# Altium PCB PCB2.PcbDoc (part 1 of 2)
Units mm, origin at the board's own origin, x right, y up, seen from the top; angles counter-clockwise.
Board outline 165.86 x 82.04 mm, 2 copper layers (Top Layer, Bottom Layer); 109 components, 117 nets, 440 pads, 32 vias.
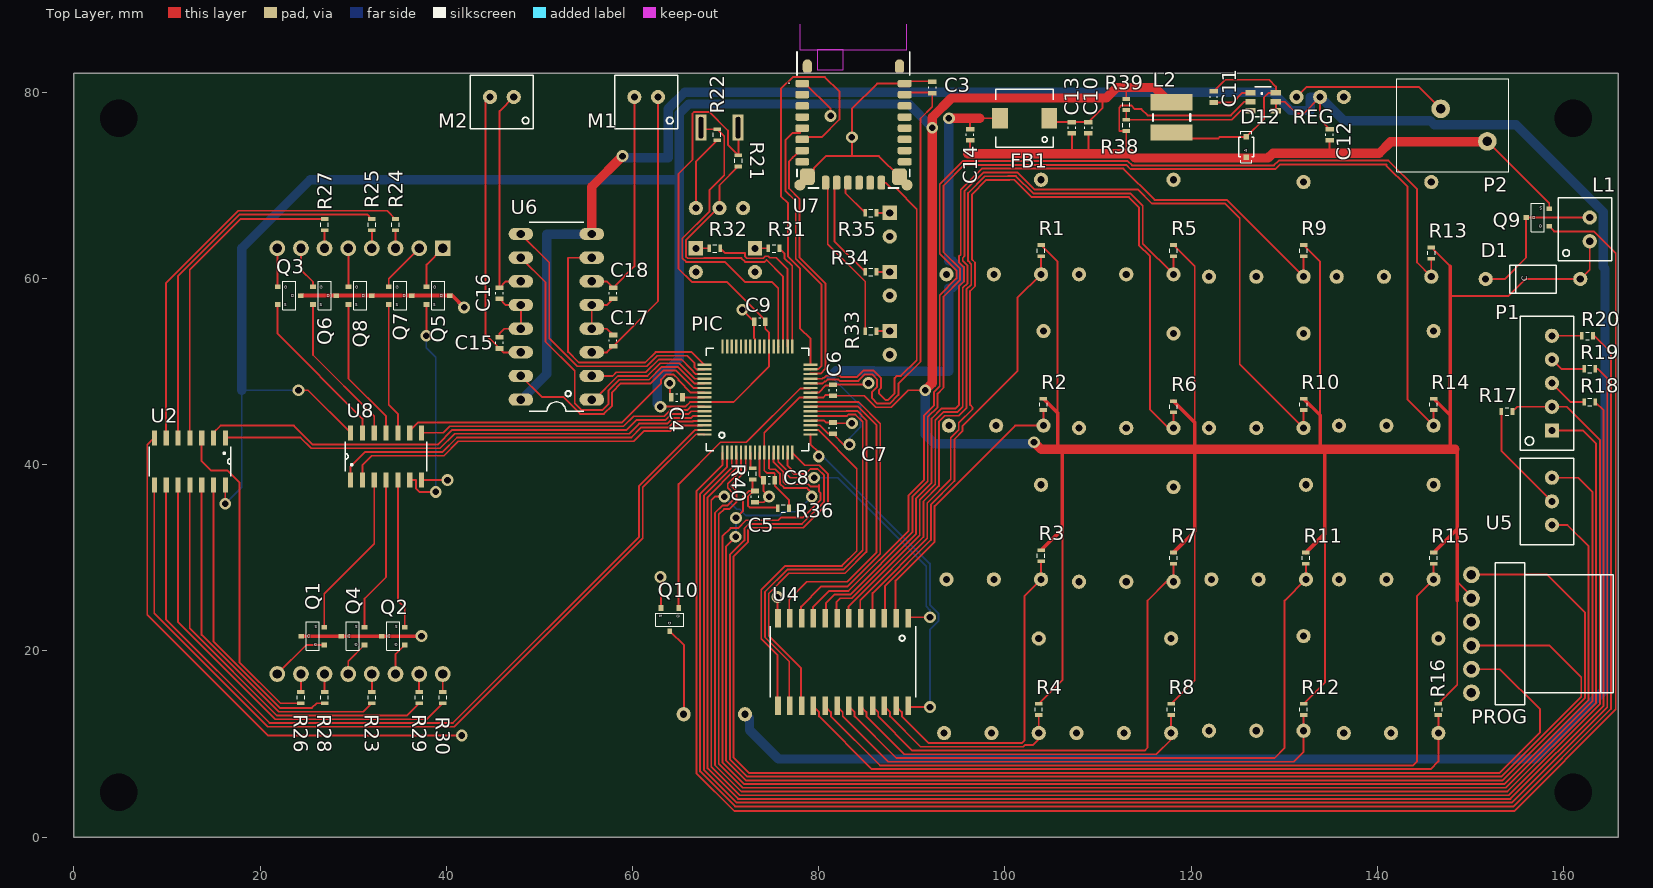
[diagram p0: Top Layer view]
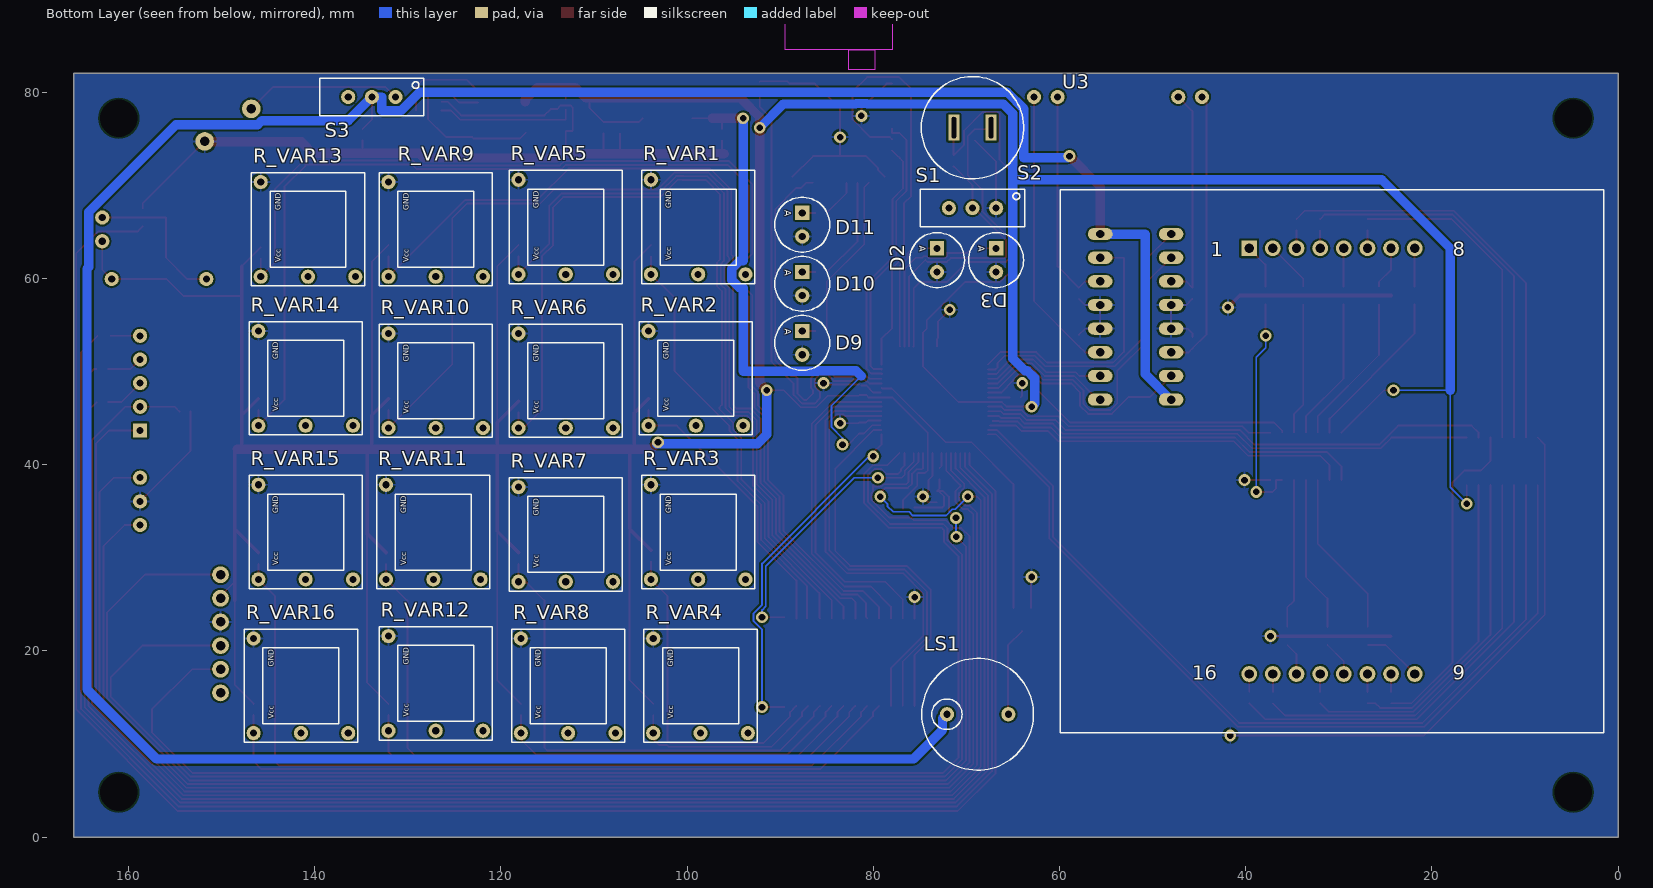
[diagram p1: Bottom Layer view, seen from below]

## Layer stack, top to bottom
Top Solder: solder mask 0.0102, Solder Resist, Dk 3.5
Top Layer: signal copper 0.0356
Dielectric 1: dielectric 0.32, FR-4, Dk 4.8
Bottom Layer: signal copper 0.0356
Bottom Solder: solder mask 0.0102, Solder Resist, Dk 3.5

## Board outline
0,0 165.862,0 165.862,82.042 0,82.042

## Design rules (kind name [scope] priority, off if disabled: settings)
Clearance [All] p1: gap=0.2
HoleSize [All] p1: absolutevalues=TRUE maxlimit=4 minlimit=0.075 maxpercent=80.000 minpercent=20.000
MinimumSolderMaskSliver [All] p1: minsoldermaskwidth=0.15
PolygonConnect [All] p1: connectstyle=Relief reliefconductorwidth=0.254 reliefentries=4 polygonreliefangle="90 Angle" airgapwidth=0.254
RoutingVias [All] p1: holewidth=0.711 width=1.27 viastyle="Through Hole" minholewidth=0.711 minwidth=1.27 maxholewidth=0.711 maxwidth=1.27
SilkToSilkClearance [All] p1: silktosilkclearance=0.1
SilkToSolderMaskClearance [IsPad] p1: minsilkscreentomaskgap=0.15 clearancetoexposedcopper=TRUE
SolderMaskExpansion [All] p1: expansion=0.04
UnpouredPolygon [All] p1: allowunpoured=FALSE
Width [All] p1: maxlimit=1 minlimit=0.2 preferedwidth=0.4
25 further rules are at their usual default settings.

## Classes and differential pairs
component class "START BUTTON": R22 S2
component class "PROXIMITY SENSOR": U5
component class PIC: C4 C5 C6 C7 C8 C9 PIC32Square R36 R40
component class "MUX ORDER GRID": R1 R2 R3 R4 R5 R6 R7 R8 R9 R10 R11 R12 R13 R14 R15 R16 R_VAR1 R_VAR2 R_VAR3 R_VAR4 R_VAR5 R_VAR6 R_VAR7 R_VAR8 R_VAR9 R_VAR10 R_VAR11 R_VAR12 R_VAR13 R_VAR14 R_VAR15 R_VAR16 U4
component class MOTOR: C15 C16 C17 C18 M1 M2 U6
component class "MODE SELECTION": D2 D3 R21 R31 R32 S1
component class "LED MATRIX": Q1 Q2 Q3 Q4 Q5 Q6 Q7 Q8 R23 R24 R25 R26 R27 R28 R29 R30 U2 U3 U8
component class ELECTROMAGNET: D1 L1 Q9
component class "COLOR SENSOR": P1 R17 R18 R19 R20
component class BUZZER: LS1 Q10
component class BLUETOOTH: C3 D9 D10 D11 R33 R34 R35 U7
component class "PIC PROGRAMMER": PROG
component class POWER: C10 C11 C12 C13 C14 D12 FB1 L2 P2 R38 R39 REG S3

## Components (designator, comment, footprint, x,y, rotation, side; value= is the part's Value field where it differs from the comment)
C3 "Cap" Capacitor 92.202,80.518 r270 top
C4 "10μF" Capacitor 64.77,47.244 r180 top
C5 "0.1μF" Capacitor 73.152,36.576 r270 top
C6 "0.1μF" Capacitor 81.534,48.006 r90 top
C7 "0.1μF" Capacitor 81.534,43.942 r90 top
C8 "0.1μF" Capacitor 74.676,38.354 r180 top
C9 "0.1μF" Capacitor 73.66,55.372 r0 top
C10 "47 μF" Capacitor 108.966,76.2 r90 top
C11 "220 nF" Capacitor 122.428,79.502 r270 top
C12 "1 μF" Capacitor 134.874,75.438 r90 top
C13 "1uF" Capacitor 107.188,76.2 r90 top
C14 "100nF" Capacitor 96.266,75.438 r90 top
C15 "0.1μF" capacitor 45.72,53.086 r90 top
C16 "0.1μF" capacitor 45.72,58.42 r90 top
C17 "0.1μF" capacitor 57.912,53.34 r270 top
C18 "0.1μF" capacitor 57.912,58.42 r270 top
D1 "1N4001" Diode 156.72,59.944 r90 top
D2 "MCL053GD" LedGreen 73.152,61.976 r270 bottom
D3 "MCL053MD" LedGreen 66.802,61.976 r270 bottom
D9 "MCL053GD" LedGreen 87.63,53.086 r270 bottom
D10 "MCL053YD" LedGreen 87.63,59.436 r270 bottom
D11 "MCL053GD" LedGreen 87.63,65.786 r270 bottom
D12 "BAS316,115" "Didode (Regulator)" 125.92,74.12 r90 top
FB1 "Comment" Inductor 102.108,77.216 r180 top
L1 "G5RL-U/-K" Electromagnet 162.814,65.278 r90 top
L2 "39uH" "Inductor (regulator)" 117.91,77.305 r180 top
LS1 "ABT-414-RC" Buzzer 68.79,13.2 r90 bottom
M1 "MG-6-120" Motor2 61.468,79.502 r180 top
M2 "MG-6-120" Motor2 45.974,79.502 r180 top
P1 "JST5" LDR_RGB 158.75,48.768 r90 top
P2 "TerminalConnector" TerminalConector 146.812,78.232 r270 top
PIC "PIC32MX340F256H" PIC32 73.41,46.99 r90 top (schematic designator PIC32Square)
PROG "22-29-2061" HEADER-6-PIN 150.114,21.844 r270 top
Q1 "2N7002" Mosfet 25.654,21.59 r180 top
Q2 "2N7002" Mosfet 34.29,21.59 r180 top
Q3 "2N7002" Mosfet 23.114,58.166 r0 top
Q4 "2N7002" Mosfet 29.972,21.59 r180 top
Q5 "2N7002" Mosfet 39.116,58.166 r0 top
Q6 "2N7002" Mosfet 26.924,58.166 r0 top
Q7 "2N7002" Mosfet 35.052,58.166 r0 top
Q8 "2N7002" Mosfet 30.734,58.166 r0 top
Q9 "2N7002-G" Mosfet 157.226,66.548 r180 top
Q10 "2N7002-G" Mosfet 64.008,23.368 r270 top
R1 "10 K" Resistor0603 103.886,62.992 r270 top
R2 "10 K" Resistor0603 104.14,46.482 r270 top
R3 "10 K" Resistor0603 103.886,30.226 r270 top
R4 "10 K" Resistor0603 103.632,13.716 r270 top
R5 "10 K" Resistor0603 118.11,62.992 r270 top
R6 "10 K" Resistor0603 118.11,46.228 r270 top
R7 "10 K" Resistor0603 118.11,29.972 r270 top
R8 "10 K" Resistor0603 117.856,13.716 r270 top
R9 "10 K" Resistor0603 132.08,62.992 r270 top
R10 "10 K" Resistor0603 132.08,46.482 r270 top
R11 "10 K" Resistor0603 132.334,29.972 r270 top
R12 "10 K" Resistor0603 132.08,13.716 r270 top
R13 "10 K" Resistor0603 145.796,62.738 r270 top
R14 "10 K" Resistor0603 146.05,46.482 r270 top
R15 "10 K" Resistor0603 146.05,29.972 r270 top
R16 "10 K" Resistor0603 146.558,13.716 r270 top
R17 "1K" Resistor0603 153.924,45.72 r180 top
R18 "87 Ohm" Resistor0603 162.814,46.736 r180 top
R19 "20 Ohm" Resistor0603 162.814,50.292 r180 top
R20 "20 Ohm" Resistor0603 162.56,53.848 r180 top
R21 "5 KOhm" Resistor0603 71.374,72.644 r90 top
R22 "5 KOhm" Resistor0603 69.088,75.438 r90 top
R23 "80 Ohm" Resistor0603 32.004,14.986 r270 top
R24 "80 Ohm" Resistor0603 34.544,65.786 r90 top
R25 "80 Ohm" Resistor0603 32.004,65.786 r90 top
R26 "80 Ohm" Resistor0603 24.384,14.986 r270 top
R27 "80 Ohm" Resistor0603 26.924,65.786 r90 top
R28 "80 Ohm" Resistor0603 26.924,14.986 r270 top
R29 "80 Ohm" Resistor0603 37.084,14.986 r270 top
R30 "80 Ohm" Resistor0603 39.624,14.986 r270 top
R31 "80 Ohm" Resistor0603 75.184,63.246 r180 top
R32 "93 Ohm" Resistor0603 68.834,63.246 r180 top
R33 "80 Ohm" Resistor0603 85.598,54.356 r180 top
R34 "80 Ohm" Resistor0603 85.598,60.706 r180 top
R35 "80 Ohm" Resistor0603 85.598,67.056 r180 top
R36 "10K" Resistor0603 76.2,35.306 r0 top
R38 "1 KOhm" Resistor0603 113.03,76.454 r90 top
R39 "3.32 KOhm" Resistor0603 113.03,78.694 r90 top
R40 "470 Ohm" Resistor0603 72.898,39.024 r270 top
R_VAR1 "1.5K ~ 100K" OrderPiece 98.806,65.532 r90 bottom
R_VAR2 "1.5K ~ 100K" OrderPiece 99.06,49.276 r90 bottom
R_VAR3 "1.5K ~ 100K" OrderPiece 98.806,32.766 r90 bottom
R_VAR4 "1.5K ~ 100K" OrderPiece 98.552,16.256 r90 bottom
R_VAR5 "1.5K ~ 100K" OrderPiece 113.03,65.532 r90 bottom
R_VAR6 "1.5K ~ 100K" OrderPiece 113.03,49.022 r90 bottom
R_VAR7 "1.5K ~ 100K" OrderPiece 113.03,32.512 r90 bottom
R_VAR8 "1.5K ~ 100K" OrderPiece 112.776,16.256 r90 bottom
R_VAR9 "1.5K ~ 100K" OrderPiece 127,65.278 r90 bottom
R_VAR10 "1.5K ~ 100K" OrderPiece 127,49.022 r90 bottom
R_VAR11 "1.5K ~ 100K" OrderPiece 127.254,32.766 r90 bottom
R_VAR12 "1.5K ~ 100K" OrderPiece 127,16.51 r90 bottom
R_VAR13 "1.5K ~ 100K" OrderPiece 140.716,65.278 r90 bottom
R_VAR14 "1.5K ~ 100K" OrderPiece 140.97,49.276 r90 bottom
R_VAR15 "1.5K ~ 100K" OrderPiece 140.97,32.766 r90 bottom
R_VAR16 "1.5K ~ 100K" OrderPiece 141.478,16.256 r90 bottom
REG "LMR14203X" REGULATOR 127.73,78.99 r270 top (schematic designator REGULATOR)
S1 "SS12SDP2" Switch 69.342,67.564 r270 bottom
S2 "R13-509A-05-BB" StartButton 69.342,76.2 r180 bottom
S3 "SS12SDP2" Switch 133.858,79.502 r270 bottom
U2 "74HC164" "SHIFT REGISTER" 12.46,40.35 r270 top
U3 "TC23-11GWA" LEDPANEL 30.734,40.386 r180 bottom
U4 "CD74HC4067SM96" MUX 82.61,18.83 r270 top
U5 "GP2Y0A41SK0F" Proximity2 158.75,36.068 r90 top
U6 "L293DNE" MotorDriver 51.82,55.89 r180 top
U7 "RN4020" bluetooth 78.232,77.216 r0 top
U8 "74HC164" "SHIFT REGISTER" 33.53,40.89 r90 top

## Footprints (in the part's own frame and the unit in brackets; to place one, negate y for a bottom-side part, rotate by r counter-clockwise, add the part's x,y. Pads: shape width x height; smd on the part's side, far side on the other; paste and mask are expansions set on the pad)
bluetooth [mm] "RN4020"
  rrect50% 1.5x0.8 smd: 1(0,3.727) 2(0,2.527) 3(0,1.327) 4(0,0.127) 5(0,-1.073) 6(0,-2.273) 7(0,-3.473) 8(0,-4.673) 17(11,-4.673) 18(11,-3.473) 19(11,-2.273) 20(11,-1.073) 21(11,0.127) 22(11,1.327) 23(11,2.527) 24(11,3.727)
  oval 1x1.6 smd: 1A(0.55,5.527) 24A(10.45,5.527)
  round 1.2 smd: 9(-0.25,-7.173) 16(11.25,-7.173)
  rrect50% 1.6x1.8 smd: 9(0.55,-6.273) 16(10.45,-6.273)
  rrect50% 0.8x1.5 smd: 10(2.5,-6.923) 11(3.7,-6.923) 12(4.9,-6.923) 13(6.1,-6.923) 14(7.3,-6.923) 15(8.5,-6.923)
  Keep-Out Layer region: -0.25,7.377 11.25,7.377 11.25,12.327 -0.25,12.327
  Keep-Out Layer region: 1.6,5.227 4.4,5.227 4.4,7.377 1.6,7.377
  silkscreen extent -0.55,-7.47 11.55,7.13
Buzzer [mil] "ABT-414-RC"
  round 60 hole 30: 1(0,129.92) 2(0,-129.92)
  silkscreen extent -236,-236 236,236
Capacitor [mm] "0603"
  rect 0.5x0.9 smd: 1(-0.6,0) 2(0.6,0)
  silkscreen extent -0.1,-0.4 0.1,0.4
capacitor [mm] "0603"
  rect 0.5x0.9 smd: 1(-0.6,0) 2(0.6,0)
  silkscreen extent -0.1,-0.4 0.1,0.4
"Didode (Regulator)" [mm] "BAS316,115"
  rect 0.6x0.6 smd: 1(-1.1,0) 2(1.1,0)
  silkscreen extent -1.7,-0.82 1.7,0.82
Diode [mil] "1N4001"
  round 60 hole 30: 1(0,200) 2(0,-200)
  silkscreen extent -59,-98 59,98
Electromagnet [mil]
  round 60 hole 30: 1(-50,0) 2(50,0)
  silkscreen extent -133,-93 133,134
HEADER-6-PIN [mm] "22-29-2061"
  round 1.8 hole 1.02: 1(-6.35,0) 2(-3.81,0) 3(-1.27,0) 4(1.27,0) 5(3.81,0) 6(6.35,0)
  silkscreen extent -7.62,2.55 7.62,15.21
Inductor [mm]
  rect 1.7x2.2 smd: 1(-2.65,0) 2(2.65,0)
  silkscreen extent -3.1,-3.1 3.1,3.1
"Inductor (regulator)" [mm] "744773139"
  rect 4.5x1.75 smd: 1(0,1.625) 2(0,-1.625)
  silkscreen extent -2,-0.35 2,0.35
LDR_RGB [mil]
  rect 60x60 hole 30: 1(-200,0)
  round 60 hole 30: 2(-100,0) 3(0,0) 4(100,0) 5(200,0)
  silkscreen extent -283,-93 283,134
LedGreen [mil] "MCL053GD"
  rect 60x60 hole 30: 1(-50,0)
  round 60 hole 30: 2(50,0)
  silkscreen extent -116,-116 116,116
LEDPANEL [mm] "TC23-11GWA"
  rect 1.7x1.7 hole 1: 1(-8.89,22.86)
  round 1.7 hole 1: 2(-6.35,22.86) 3(-3.81,22.86) 4(-1.27,22.86) 5(1.27,22.86) 6(3.81,22.86) 7(6.35,22.86) 8(8.89,22.86) 9(8.89,-22.86) 10(6.35,-22.86) 11(3.81,-22.86) 12(1.27,-22.86) 13(-1.27,-22.86) 14(-3.81,-22.86) 15(-6.35,-22.86) 16(-8.89,-22.86)
  silkscreen extent -29.17,-29.17 29.17,29.17
Mosfet [mm] "2N7002_G"
  rect 0.6x0.5 smd: 1(-1.24,0.95) 2(-1.24,-0.95) 3(1.24,0)
  silkscreen extent -0.7,-1.52 0.7,1.52
Motor2 [mil]
  round 60 hole 30: 1(-50,0) 2(50,0)
  silkscreen extent -133,-93 133,134
MotorDriver [mil] "L293DNE"
  oval 104x52 hole 35.43: 1(-150,350) 2(-150,250) 3(-150,150) 4(-150,50) 5(-150,-50) 6(-150,-150) 7(-150,-250) 8(-150,-350) 9(150,-350) 10(150,-250) 11(150,-150) 12(150,-50) 13(150,50) 14(150,150) 15(150,250) 16(150,350)
  silkscreen extent -115,-400 115,400
MUX [mm] "CD74HC4067"
  rect 2x0.6 smd: 1(-4.7,6.985) 2(-4.7,5.715) 3(-4.7,4.445) 4(-4.7,3.175) 5(-4.7,1.905) 6(-4.7,0.635) 7(-4.7,-0.635) 8(-4.7,-1.905) 9(-4.7,-3.175) 10(-4.7,-4.445) 11(-4.7,-5.715) 12(-4.7,-6.985) 13(4.7,-6.985) 14(4.7,-5.715) 15(4.7,-4.445) 16(4.7,-3.175) 17(4.7,-1.905) 18(4.7,-0.635) 19(4.7,0.635) 20(4.7,1.905) 21(4.7,3.175) 22(4.7,4.445) 23(4.7,5.715) 24(4.7,6.985)
  silkscreen extent -3.8,-7.8 3.8,7.8
OrderPiece [mil]
  round 60 hole 30: 1(-200,200) 2(200,200) 3(-200,0) 4(-200,-200)
  silkscreen extent -239,-239 239,239
PIC32 [mm] "PIC32MX270F256D"
  rect 1.5x0.25 smd: 1(-5.7,3.75) 2(-5.7,3.25) 3(-5.7,2.75) 4(-5.7,2.25) 5(-5.7,1.75) 6(-5.7,1.25) 7(-5.7,0.75) 8(-5.7,0.25) 9(-5.7,-0.25) 10(-5.7,-0.75) 11(-5.7,-1.25) 12(-5.7,-1.75) 13(-5.7,-2.25) 14(-5.7,-2.75) 15(-5.7,-3.25) 16(-5.7,-3.75) 33(5.7,-3.75) 34(5.7,-3.25) 35(5.7,-2.75) 36(5.7,-2.25) 37(5.7,-1.75) 38(5.7,-1.25) 39(5.7,-0.75) 40(5.7,-0.25) 41(5.7,0.25) 42(5.7,0.75) 43(5.7,1.25) 44(5.7,1.75) 45(5.7,2.25) 46(5.7,2.75) 47(5.7,3.25) 48(5.7,3.75)
  rect 0.25x1.5 smd: 17(-3.75,-5.7) 18(-3.25,-5.7) 19(-2.75,-5.7) 20(-2.25,-5.7) 21(-1.75,-5.7) 22(-1.25,-5.7) 23(-0.75,-5.7) 24(-0.25,-5.7) 25(0.25,-5.7) 26(0.75,-5.7) 27(1.25,-5.7) 28(1.75,-5.7) 29(2.25,-5.7) 30(2.75,-5.7) 31(3.25,-5.7) 32(3.75,-5.7) 49(3.75,5.7) 50(3.25,5.7) 51(2.75,5.7) 52(2.25,5.7) 53(1.75,5.7) 54(1.25,5.7) 55(0.75,5.7) 56(0.25,5.7) 57(-0.25,5.7) 58(-0.75,5.7) 59(-1.25,5.7) 60(-1.75,5.7) 61(-2.25,5.7) 62(-2.75,5.7) 63(-3.25,5.7) 64(-3.75,5.7)
  silkscreen extent -5.5,-5.5 5.5,5.5
Proximity2 [mil]
  round 60 hole 30: 1(-100,0) 2(0,0) 3(100,0)
  silkscreen extent -183,-93 183,134
REGULATOR [mm]
  rect 0.6x1.1 smd: 1(-0.95,-1.35) 2(0,-1.35) 3(0.95,-1.35) 4(0.95,1.35) 5(0,1.35) 6(-0.95,1.35)
  silkscreen extent -1.6,-0.87 1.6,0.87
Resistor0603 [mm]
  rect 0.4x0.8 smd: 1(-0.6,0) 2(0.6,0)
  silkscreen extent -0.2,-0.4 0.2,0.4
"SHIFT REGISTER" [mil] "74HC164"
  rect 63x22 smd: 1(-100,150) 2(-100,100) 3(-100,50) 4(-100,0) 5(-100,-50) 6(-100,-100) 7(-100,-150) 8(100,-150) 9(100,-100) 10(100,-50) 11(100,0) 12(100,50) 13(100,100) 14(100,150)
  silkscreen extent -62,-172 62,172
StartButton [mm] "R13-509A-05-BB"
  rect 1.2x2.8 hole 0.5 slot 2.3 at 90 deg: 1(-2,0) 2(2,0)
  silkscreen extent -5.5,-5.5 5.5,5.5
Switch [mil] "SS12SDP2"
  round 60 hole 30: 1(0,100) 2(0,0) 3(0,-100)
  silkscreen extent -79,-220 79,220
TerminalConector [mm]
  round 2 hole 1: 1(0,0) 2(3.5,5)
  silkscreen extent -3.25,-4.7 6.75,7.3

## Part data
C3: "Capacitor"
C4 C5 C6 C7 C8 C9 C10 C11 C12 C13 C14 C15 C16 C17 C18: library part Cap, "Capacitor"
D1 D12: library part Diode, "Default Diode"
D2 D3 D9 D10 D11: library part LED0, "Typical INFRARED GaAs LED"
FB1 L2: library part Inductor, "Inductor"
L1: library part "Inductor Iron", "Magnetic-Core Inductor"
LS1: library part "Header 2", "Header, 2-Pin"
M1 M2: library part Motor, "Motor, General Kind"
P1: library part MHDR1X5, "Header, 5-Pin"
P2: library part "Header 2H", "Header, 2-Pin, Right Angle"
PIC: library part PIC32square
PROG: library part HEADER-6-PIN
Q1 Q2 Q3 Q4 Q5 Q6 Q7 Q8 Q9 Q10: library part MOSFET-N, "N-Channel MOSFET"
R1 R2 R3 R4 R5 R6 R7 R8 R9 R10 R11 R12 R13 R14 R15 R16 R17 R18 R19 R20 R21 R22 R23 R24 R25 R26 R27 R28 R29 R30 R31 R32 R33 R34 R35 R36 R38 R39 R40 R_VAR1 R_VAR2 R_VAR3 R_VAR4 R_VAR5 R_VAR6 R_VAR7 R_VAR8 R_VAR9 R_VAR10 R_VAR11 R_VAR12 R_VAR13 R_VAR14 R_VAR15 R_VAR16: library part Res1, "Resistor"
REG: library part Regulator
S1 S3: library part SW-SPST, "Single-Pole, Single-Throw Switch"
S2: library part SW-PB, "Switch"
U2 U8: library part "Shift Register"
U3: library part "LED Dot Matrix"
U4: library part "Analog Multiplexor"
U5: library part "Proximity sensor"
U6: library part "Motor Driver"
U7: library part Blueetooth

## Free pads (board coordinates)
  round 2.4 hole 4 unplated: 2(4.826,4.826) 2(4.826,77.216) 2(161.036,4.826) 2(161.036,77.216)

## Via types
v1: diameter 1.27, hole 0.711, Top Layer to Bottom Layer, 32 vias

## Nets (pads, with @x,y where several pads share a name; then routed paths per layer and width w, separated by ;. In a path a pad name is that pad's centre, name@x,y a point inside that pad or via, vN(x,y) a via of type N, cw(c..) or ccw(c..) an arc to the next point about the centre after c; other vN are vias at no path point)
3.3V: C6.1 C8.1 C9.2 C10.2 C13.2 D1.2 FB1.1 L1.1 L2.2 PIC.10 PIC.25 PIC.38 PIC.57 PROG.2 R1.1 R2.1 R3.1 R4.1 R5.1 R6.1 R7.1 R8.1 R9.1 R10.1 R11.1 R12.1 R13.1 R14.1 R15.1 R16.1 R21.2 R36.2 R39.2 S2.1 U2.14 U8.14 | length 621.2
  Top Layer w0.2: v1(16.256,35.814) U2.14@16.256,37.846 ; v1(24.13,48.006) 25.146,48.006 U8.14@29.718,43.434 ; v1(62.992,46.228) 63.03,46.266 65.709,46.266 66.183,46.74 PIC.57@67.71,46.74 70.87,46.74 74.656,50.526 74.656,54.214 74.26,54.61 C9.2@74.26,55.372 74.26,55.494 70.11,59.644 66.362,59.644 64.94,61.066 64.94,71.256 66.442,72.758 66.442,77.724 66.618,77.9 68.25,77.9 70.25,75.9 70.25,74.368 R21.2@71.374,73.244 71.374,76.168 S2.1@71.342,76.2 ; R36.2@76.8,35.306 76.8,36.23 75.276,37.754 C8.1@75.276,38.354 75.276,39.024 75.184,39.116 74.422,39.116 74.156,39.382 74.156,43.454 77.942,47.24 PIC.25@79.11,47.24 80.514,47.24 80.772,47.498 81.442,47.498 C6.1@81.534,47.406 84.894,47.406 86.129,46.171 87.785,46.171 89.62,48.006 v1(91.44,48.006) ; R4.1@103.632,14.316 106.172,16.856 106.172,33.112 ; R1.1@103.886,63.592 105.664,61.814 105.664,45.558 ; FB1.1@104.758,77.216 105.174,76.8 C13.2@107.188,76.8 C10.2@108.966,76.8 110.49,78.324 110.49,79.394 ; R39.2@113.03,79.294 113.03,80.518 ; R8.1@117.856,14.316 120.396,16.856 120.396,32.858 ; R5.1@118.11,63.592 120.396,61.306 120.396,44.542 ; R12.1@132.08,14.316 134.366,16.602 134.366,32.604 ; R9.1@132.08,63.592 133.858,61.814 133.858,45.304 ; R13.1@145.796,63.338 147.828,61.306 ; R16.1@146.558,14.316 148.59,16.348 148.59,25.4 ; 147.828,58.12 154.066,58.12 155.89,59.944 161.798,59.944 162.814,60.96 L1.1@162.814,64.008 ; 148.336,41.656 148.59,41.402 ; 148.59,27.432 PROG.2@150.368,25.654
  Top Layer w0.4: R3.1@103.886,30.826 106.172,33.112 106.172,41.656 ; R2.1@104.14,47.082 105.664,45.558 105.664,41.656 ; R7.1@118.11,30.572 120.396,32.858 120.396,41.656 120.396,44.542 R6.1@118.11,46.828 ; R10.1@132.08,47.082 133.858,45.304 133.858,41.656 ; R11.1@132.334,30.572 134.366,32.604 134.366,41.656 ; R15.1@146.05,30.572 148.59,33.112 ; R14.1@146.05,47.082 147.828,45.304 ; 147.828,41.656 147.828,45.304 ; 147.828,61.306 147.828,58.12 147.828,45.304 ; 148.59,25.4 148.59,27.432 148.59,33.112 ; 148.59,41.402 148.59,33.112
  Top Layer w1: v1(91.44,48.006) 92.202,48.768 v1(92.202,76.2) 92.202,77.326 94.27,79.394 110.49,79.394 110.89,79.394 112.014,80.518 113.03,80.518 116.082,80.518 117.371,79.229 L2.2@117.371,78.971 ; v1(103.124,42.418) 103.886,41.656 105.664,41.656 106.172,41.656 120.396,41.656 133.858,41.656 134.366,41.656 147.828,41.656 148.336,41.656
  Bottom Layer w0.2: v1(16.256,35.814) 18.034,37.592 18.034,48.006 v1(24.13,48.006)
  Bottom Layer w1: 18.034,48.006 18.034,63.246 25.4,70.612 65.024,70.612 ; v1(62.992,46.228) 62.673,46.547 62.673,49.321 63.455,50.103 63.709,50.103 65.024,51.418 65.024,70.612 ; v1(91.44,48.006) 91.44,43.25 92.439,42.251 103.291,42.251 v1(103.124,42.418) ; v1(92.202,76.2) 89.662,78.74 81.898,78.74 81.833,78.805 80.727,78.805 80.662,78.74 66.04,78.74 65.024,77.724 65.024,70.612
3.3VA: C7.1 C14.2 FB1.2 PIC.19 | length 62.1
  Top Layer w0.2: PIC.19@79.198,44.24 80.112,44.24 81.01,43.342 C7.1@81.534,43.342 82.712,42.164 v1@83.566,42.164 ; C14.2@96.266,76.038 96.266,76.708 ; 97.282,77.216 FB1.2@99.458,77.216
  Top Layer w1: v1(93.98,77.216) 97.282,77.216
  Bottom Layer w0.2: 81.28,49.53 84.501,46.309 84.501,44.063 83.312,42.874 v1(83.312,42.164)
  Bottom Layer w1: 81.28,49.53 81.853,50.103 85.897,50.103 85.962,50.038 93.98,50.038 93.98,58.99 94.332,58.99 95.188,59.846 95.188,61.058 94.332,61.914 93.98,61.914 v1(93.98,77.216)
6V: C12.2 LS1.1 REG.4 REG.5 S3.2 U6.8 U6.16 | length 312.7
  Top Layer w0.2: REG.4@129.112,78.044 129.112,78.994 130.048,78.994 131.318,77.724 132.08,77.724 S3.2@133.858,79.502 133.858,77.054 C12.2@134.874,76.038
  Top Layer w1: U6.8@55.626,64.77 55.626,69.85 v1(58.928,73.152)
  Bottom Layer w1: U6.16@48.006,46.99 48.05,46.99 50.8,49.74 50.8,64.77 U6.8@55.626,64.77 ; v1(58.928,73.152) 59.112,72.968 63.824,72.968 63.824,78.221 65.608,80.005 128.747,80.005 130.712,78.04 132.78,78.04 132.78,79.502 S3.2@133.858,79.502 136.398,76.962 145.678,76.962 146.108,76.532 154.898,76.532 164.276,67.154 164.276,61.231 164.46,61.047 164.46,15.87 156.978,8.388 75.686,8.388 72.561,11.513 72.561,12.781 LS1.1@72.134,13.208
"COL 1": R23.2 U2.12 | length 38.2
  Top Layer w0.2: U2.12@13.716,37.846 13.716,24.269 13.716,21.729 21.983,13.462 31.08,13.462 R23.2@32.004,14.386
"COL 2": R24.2 U2.6 | length 44.8
  Top Layer w0.2: U2.6@9.906,42.926 9.906,59.551 17.641,67.286 33.644,67.286 R24.2@34.544,66.386
"COL 3": R25.2 U2.5 | length 41.1
  Top Layer w0.2: U2.5@11.176,42.926 11.176,60.256 17.806,66.886 31.504,66.886 R25.2@32.004,66.386
"COL 4": R26.2 U2.3 | length 35.3
  Top Layer w0.2: U2.3@13.716,42.926 13.716,40.386 14.732,39.37 16.51,39.37 17.78,38.1 17.78,18.796 22.19,14.386 R26.2@24.384,14.386
"COL 5": R27.2 U2.4 | length 34.8
  Top Layer w0.2: U2.4@12.446,42.926 12.446,60.96 17.872,66.386 R27.2@26.924,66.386
"COL 6": R28.2 U2.13 | length 31.9
  Top Layer w0.2: U2.13@14.986,37.846 14.986,23.564 14.986,21.024 22.124,13.886 25.57,13.886 26.07,14.386 R28.2@26.924,14.386
"COL 7": R29.2 U2.11 | length 44.5
  Top Layer w0.2: U2.11@12.446,37.846 12.446,24.973 12.446,22.433 21.817,13.062 35.76,13.062 R29.2@37.084,14.386
"COL 8": R30.2 U2.10 | length 48.2
  Top Layer w0.2: U2.10@11.176,37.846 11.176,25.654 11.176,23.114 21.628,12.662 37.9,12.662 R30.2@39.624,14.386
GND: C3.1 C4.2 C5.2 C6.2 C7.2 C8.2 C9.1 C10.1 C12.1 C13.1 C14.1 C15.2 C16.1 C17.1 C18.2 D2.2 D3.2 D9.2 D10.2 D11.2 D12.1 P2.2 PIC.9 PIC.20 PIC.26 PIC.41 PROG.3 Q1.3 Q2.3 Q3.3 Q4.3 Q5.3 Q6.3 Q7.3 Q8.3 Q9.2 Q10.2 R17.2 R22.1 R38.1 R_VAR1.2 R_VAR2.2 R_VAR3.2 R_VAR4.2 R_VAR5.2 R_VAR6.2 R_VAR7.2 R_VAR8.2 R_VAR9.2 R_VAR10.2 R_VAR11.2 R_VAR12.2 R_VAR13.2 R_VAR14.2 R_VAR15.2 R_VAR16.2 REG.2 S1.1 U2.7 U4.12 U5.2 U6.4 U6.5 U6.12 U6.13 U7.1 U7.9 U7.16 U7.24 U8.7 | length 286.2
  Top Layer w0.2: U2.7@8.636,42.926 7.874,42.164 7.874,23.876 20.828,10.922 v1(41.656,10.922) ; U8.7@37.338,38.354 v1(40.132,38.354) ; C15.2@45.72,53.686 45.72,54.102 46.228,54.61 48.006,54.61 48.006,57.15 46.39,57.15 C16.1@45.72,57.82 ; C17.1@57.912,53.94 57.242,54.61 55.626,54.61 55.626,57.15 57.242,57.15 C18.2@57.912,57.82 ; v1(62.992,27.94) 63.058,27.874 Q10.2@63.058,24.608 ; v1(64.008,48.768) 64.008,47.406 C4.2@64.17,47.244 ; D3.2@66.802,60.706 D3.2@66.802,61.384 ; S1.1@66.802,67.056 S1.1@66.802,67.564 66.802,72.552 R22.1@69.088,74.838 ; v1(71.79,56.642) C9.1@73.06,55.372 73.06,53.61 73.156,53.514 PIC.41@73.156,52.69 ; C5.2@73.152,35.976 74.076,35.976 v1(74.676,36.576) 74.076,37.176 C8.2@74.076,38.354 73.656,38.774 PIC.9@73.656,41.29 ; U4.12@75.565,23.496 v1(75.565,25.781) ; U7.1@77.978,80.943 U7.1@78.232,80.943 78.569,80.943 81.28,78.232 v1(81.28,77.47) ; U7.9@78.782,70.943 79.502,71.663 79.502,71.882 80.772,73.152 83.566,73.152 ; PIC.20@79.198,44.74 80.574,44.74 80.772,44.542 C7.2@81.534,44.542 81.626,44.45 v1(83.566,44.45) ; PIC.26@79.198,47.74 79.998,47.74 80.772,48.514 C6.2@81.28,48.514 ; C6.2@81.534,48.606 84.674,48.606 84.836,48.768 v1(85.344,48.768) ; U7.16@88.682,70.943 86.473,73.152 83.566,73.152 ; C3.1@92.202,81.118 92.123,81.197 89.232,81.197 88.978,80.943 86.277,80.943 83.566,78.232 v1(83.566,75.184) 83.566,73.152 ; 96.012,73.406 96.266,73.66 C14.1@96.266,74.838 ; 107.188,73.406 C13.1@107.188,75.6 ; 108.712,73.406 108.966,73.66 C10.1@108.966,75.6 ; 113.03,73.406 R38.1@113.03,75.854 112.289,75.854 112.276,75.867 112.276,78.364 112.506,78.594 113.554,78.594 113.954,78.194 114.668,78.194 115.332,77.53 124.266,77.53 125.73,78.994 REG.2@126.412,78.994 ; 134.874,73.466 C12.1@134.874,74.838 ; P2.2@151.582,74.676 151.638,74.732 P2.2@151.812,74.732 158.466,68.078 Q9.2@158.466,67.498 ; R17.2@153.324,45.72 153.324,41.494 U5.2@158.75,36.068
  Top Layer w0.4: Q3.3@24.354,58.166 Q6.3@28.164,58.166 Q8.3@31.974,58.166 Q7.3@36.292,58.166 Q5.3@40.356,58.166 40.64,58.166 v1(41.91,56.896) ; Q1.3@24.414,21.59 Q4.3@28.732,21.59 Q2.3@33.05,21.59 v1(37.338,21.59)
  Top Layer w1: 96.012,73.406 107.188,73.406 108.712,73.406 113.03,73.406 113.527,73.406 113.986,72.947 128.265,72.947 128.784,73.466 134.874,73.466 140.212,73.466 141.422,74.676 P2.2@151.582,74.676 ; P2.2@151.638,74.732 P2.2@151.892,74.986
"INPUT 1": R1.2 R_VAR1.1 U4.3 | length 45.8
  Top Layer w0.2: U4.3@87.122,23.496 87.122,26.982 92.056,31.916 92.056,35.726 94.586,38.255 94.586,42.734 95.442,43.59 95.442,44.134 101.346,50.038 101.346,57.912 R_VAR1.1@103.886,60.452 R1.2@103.886,62.392
"INPUT 2": R2.2 R_VAR2.1 U4.2 | length 30.7
  Top Layer w0.2: U4.2@88.265,23.496 88.265,27.559 92.456,31.75 92.456,35.56 101.092,44.196 R_VAR2.1@104.14,44.196 R2.2@104.14,45.882
"INPUT 3": R3.2 R_VAR3.1 U4.23 | length 35.8
  Top Layer w0.2: U4.23@88.265,14.096 88.935,13.426 88.935,12.972 91.805,10.102 101.79,10.102 102.108,10.42 102.108,25.908 R_VAR3.1@103.886,27.686 R3.2@103.886,29.626
"INPUT 4": R4.2 R_VAR4.1 U4.22 | length 21.7
  Top Layer w0.2: U4.22@86.995,14.096 87.665,13.426 87.665,12.972 90.935,9.702 101.956,9.702 102.134,9.88 102.984,9.88 103.632,10.528 R_VAR4.1@103.632,11.176 R4.2@103.632,13.116
"INPUT 5": R5.2 R_VAR5.1 U4.5 | length 83.2
  Top Layer w0.2: U4.5@84.455,23.496 84.455,25.446 91.256,32.247 91.256,36.057 92.918,37.719 92.918,44.636 93.54,45.258 95.042,45.258 95.866,46.082 95.866,58.827 96.388,59.349 96.388,61.555 96.05,61.893 96.05,69.189 97.848,70.986 100.31,70.986 100.33,71.006 101.18,71.006 103.036,69.15 113.476,69.15 114.808,67.818 114.808,63.754 R_VAR5.1@118.11,60.452 R5.2@118.11,62.392
"INPUT 6": R6.2 R_VAR6.1 U4.4 | length 97.5
  Top Layer w0.2: U4.4@85.725,23.496 85.794,23.565 85.794,26.22 91.656,32.081 91.656,35.891 94.186,38.421 94.186,42.9 95.042,43.756 95.042,44.496 96.52,45.974 96.52,46.17 96.266,46.424 96.266,58.662 96.788,59.184 96.788,61.72 96.45,62.058 96.45,69.023 98.013,70.586 100.476,70.586 100.496,70.606 101.015,70.606 102.871,68.75 113.31,68.75 114.398,67.662 114.398,63.598 115.57,62.426 115.57,45.974 117.602,43.942 R_VAR6.1@118.11,43.942 R6.2@118.11,45.628
"INPUT 7": R7.2 R_VAR7.1 U4.21 | length 53.3
  Top Layer w0.2: U4.21@85.725,14.096 86.395,13.426 86.395,12.972 90.065,9.302 114.998,9.302 115.316,9.62 115.316,25.4 117.348,27.432 R_VAR7.1@118.11,27.432 R7.2@118.11,29.372
"INPUT 8": R8.2 R_VAR8.1 U4.20 | length 39.1
  Top Layer w0.2: U4.20@84.455,14.096 85.125,13.426 85.125,12.972 89.195,8.902 116.268,8.902 117.856,10.49 R_VAR8.1@117.856,11.176 R8.2@117.856,13.116
"INPUT 9": R9.2 R_VAR9.1 U4.7 | length 98.4
  Top Layer w0.2: U4.7@81.915,23.496 81.915,25.273 82.296,25.654 83.532,25.654 90.456,32.578 90.456,36.388 92.118,38.05 92.118,44.967 93.209,46.058 94.711,46.058 95.066,46.413 95.066,59.159 95.588,59.681 95.588,61.223 95.066,61.745 95.066,62.371 95.25,62.555 95.25,69.52 97.536,71.806 112.725,71.806 116.078,68.453 123.825,68.453 R_VAR9.1@132.08,60.198 R9.2@132.08,62.392
"INPUT 10": R10.2 R_VAR10.1 U4.6 | length 112.1
  Top Layer w0.2: U4.6@83.185,23.496 83.185,24.742 90.856,32.413 90.856,36.223 92.518,37.885 92.518,44.802 93.374,45.658 94.876,45.658 95.466,46.248 95.466,58.993 95.988,59.515 95.988,61.389 95.466,61.911 95.466,62.206 95.65,62.39 95.65,69.354 97.702,71.406 101.346,71.406 103.202,69.55 114.3,69.55 115.797,68.053 123.659,68.053 125.222,66.49 125.222,50.8 R_VAR10.1@132.08,43.942 R10.2@132.08,45.882
"INPUT 11": R11.2 R_VAR11.1 U4.19 | length 70.6
  Top Layer w0.2: U4.19@83.185,14.096 83.855,13.426 83.855,12.972 88.325,8.502 128.968,8.502 130.048,9.582 130.048,25.4 R_VAR11.1@132.334,27.686 R11.2@132.334,29.372
"INPUT 12": R12.2 R_VAR12.1 U4.18 | length 57.3
  Top Layer w0.2: U4.18@81.915,14.096 82.585,13.426 82.585,12.972 87.455,8.102 131,8.102 132.08,9.182 R_VAR12.1@132.08,11.43 R12.2@132.08,13.116
"INPUT 13": R13.2 R_VAR13.1 U4.9 | length 120.9
  Top Layer w0.2: U4.9@79.375,23.496 79.375,24.715 81.114,26.454 83.2,26.454 89.656,32.91 89.656,36.72 91.318,38.382 91.318,45.299 92.375,46.356 92.375,47.81 93.002,48.437 93.002,58.226 94.788,60.012 94.788,60.892 93.002,62.678 93.002,70.142 95.466,72.606 113.196,72.606 113.655,72.147 128.889,72.147 129.405,72.663 131.823,72.663 131.826,72.666 141.202,72.666 144.272,69.596 144.272,61.722 R_VAR13.1@145.796,60.198 R13.2@145.796,62.138
"INPUT 14": R14.2 R_VAR14.1 U4.8 | length 135
  Top Layer w0.2: U4.8@80.645,23.496 80.772,23.623 80.772,25.146 81.68,26.054 83.366,26.054 90.056,32.744 90.056,36.554 91.718,38.216 91.718,45.133 92.775,46.19 92.775,47.644 93.402,48.271 93.402,58.06 95.188,59.846 95.188,61.058 93.402,62.844 93.402,69.976 95.632,72.206 113.03,72.206 113.489,71.747 129.055,71.747 129.571,72.263 131.988,72.263 131.992,72.266 140.97,72.266 140.97,72.136 143.256,69.85 143.256,46.99 R_VAR14.1@146.05,44.196 R14.2@146.05,45.882